# Altium PCB hat.PcbDoc (part 1 of 2)
Units mm, origin at the board's own origin, x right, y up, seen from the top; angles counter-clockwise.
Board outline 64 x 85 mm, 4 copper layers (Top Layer, Ground Plane, Power Plane, Bottom Layer), stack 0.844 mm thick; 120 components, 68 nets, 381 pads, 144 vias.
Unrouted connection lines stored in the file: 19.
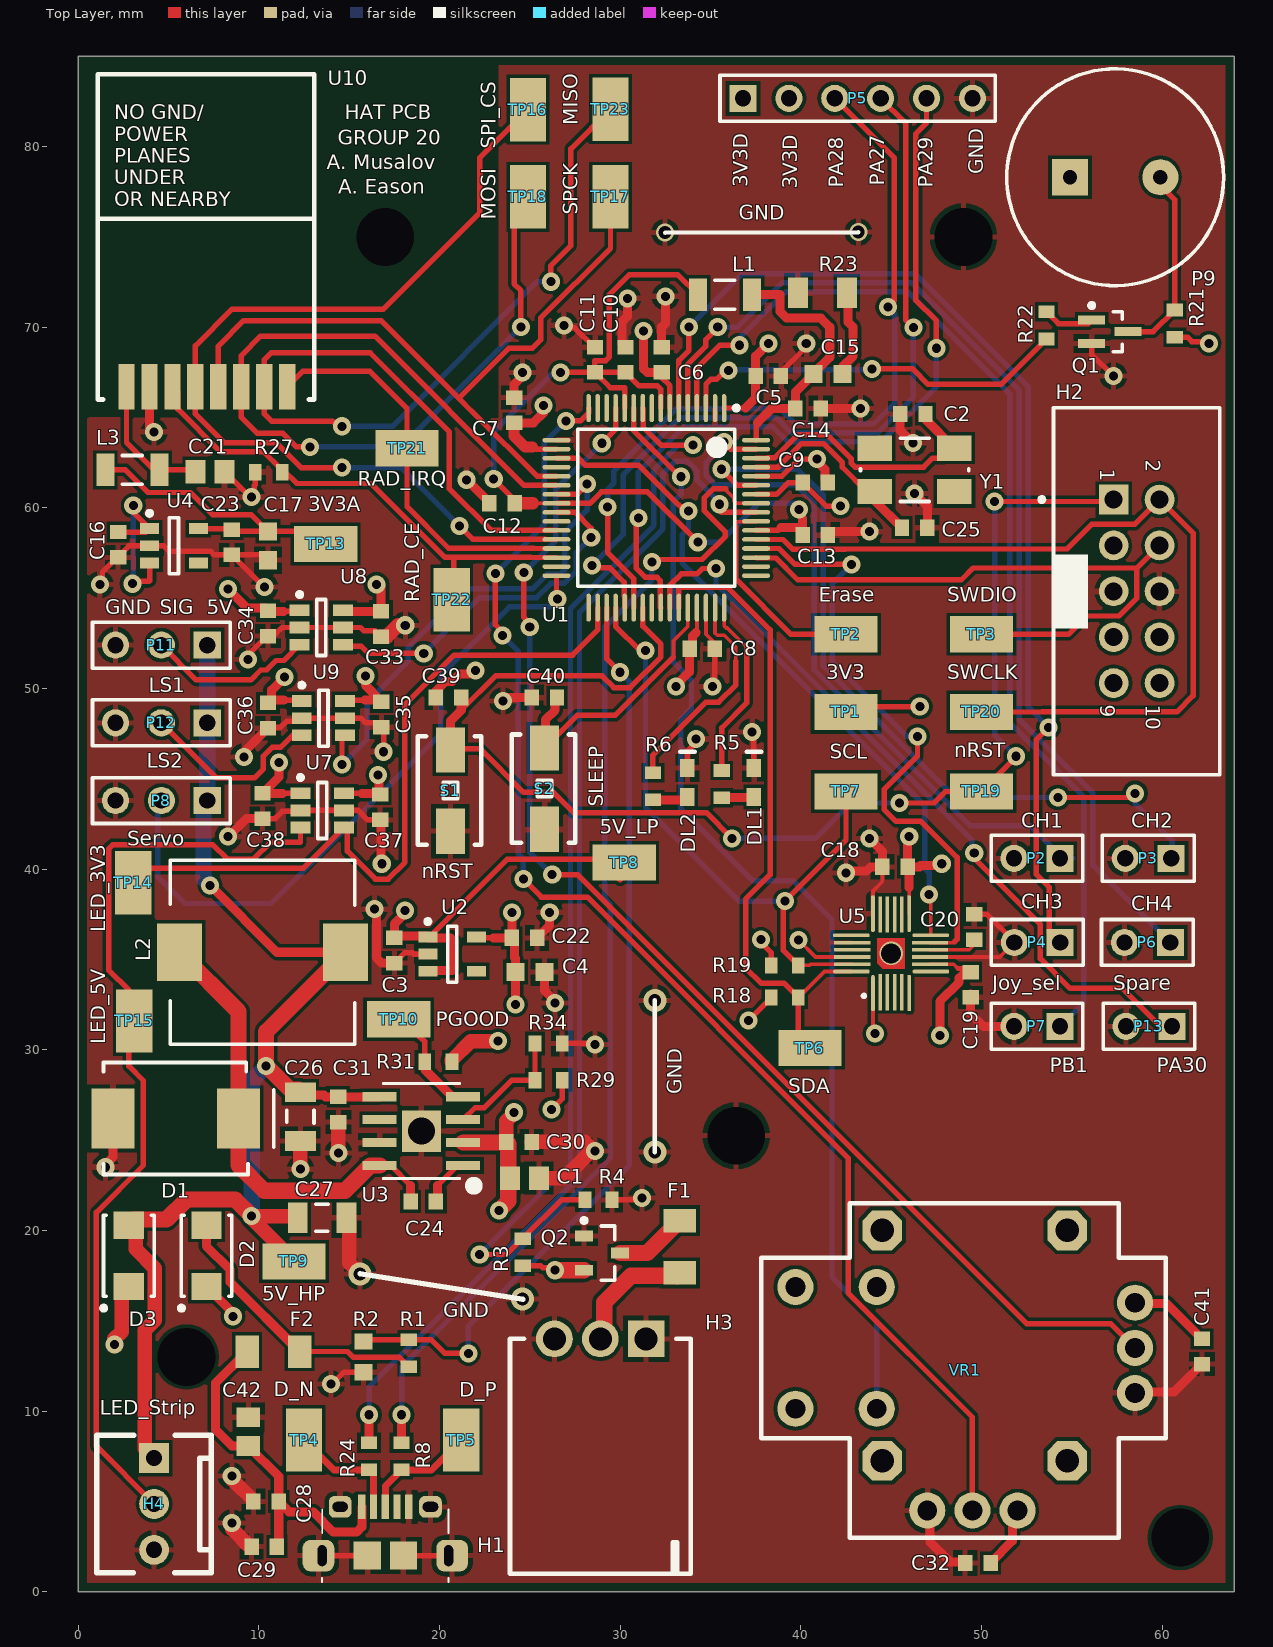
[diagram p0: Top Layer view]
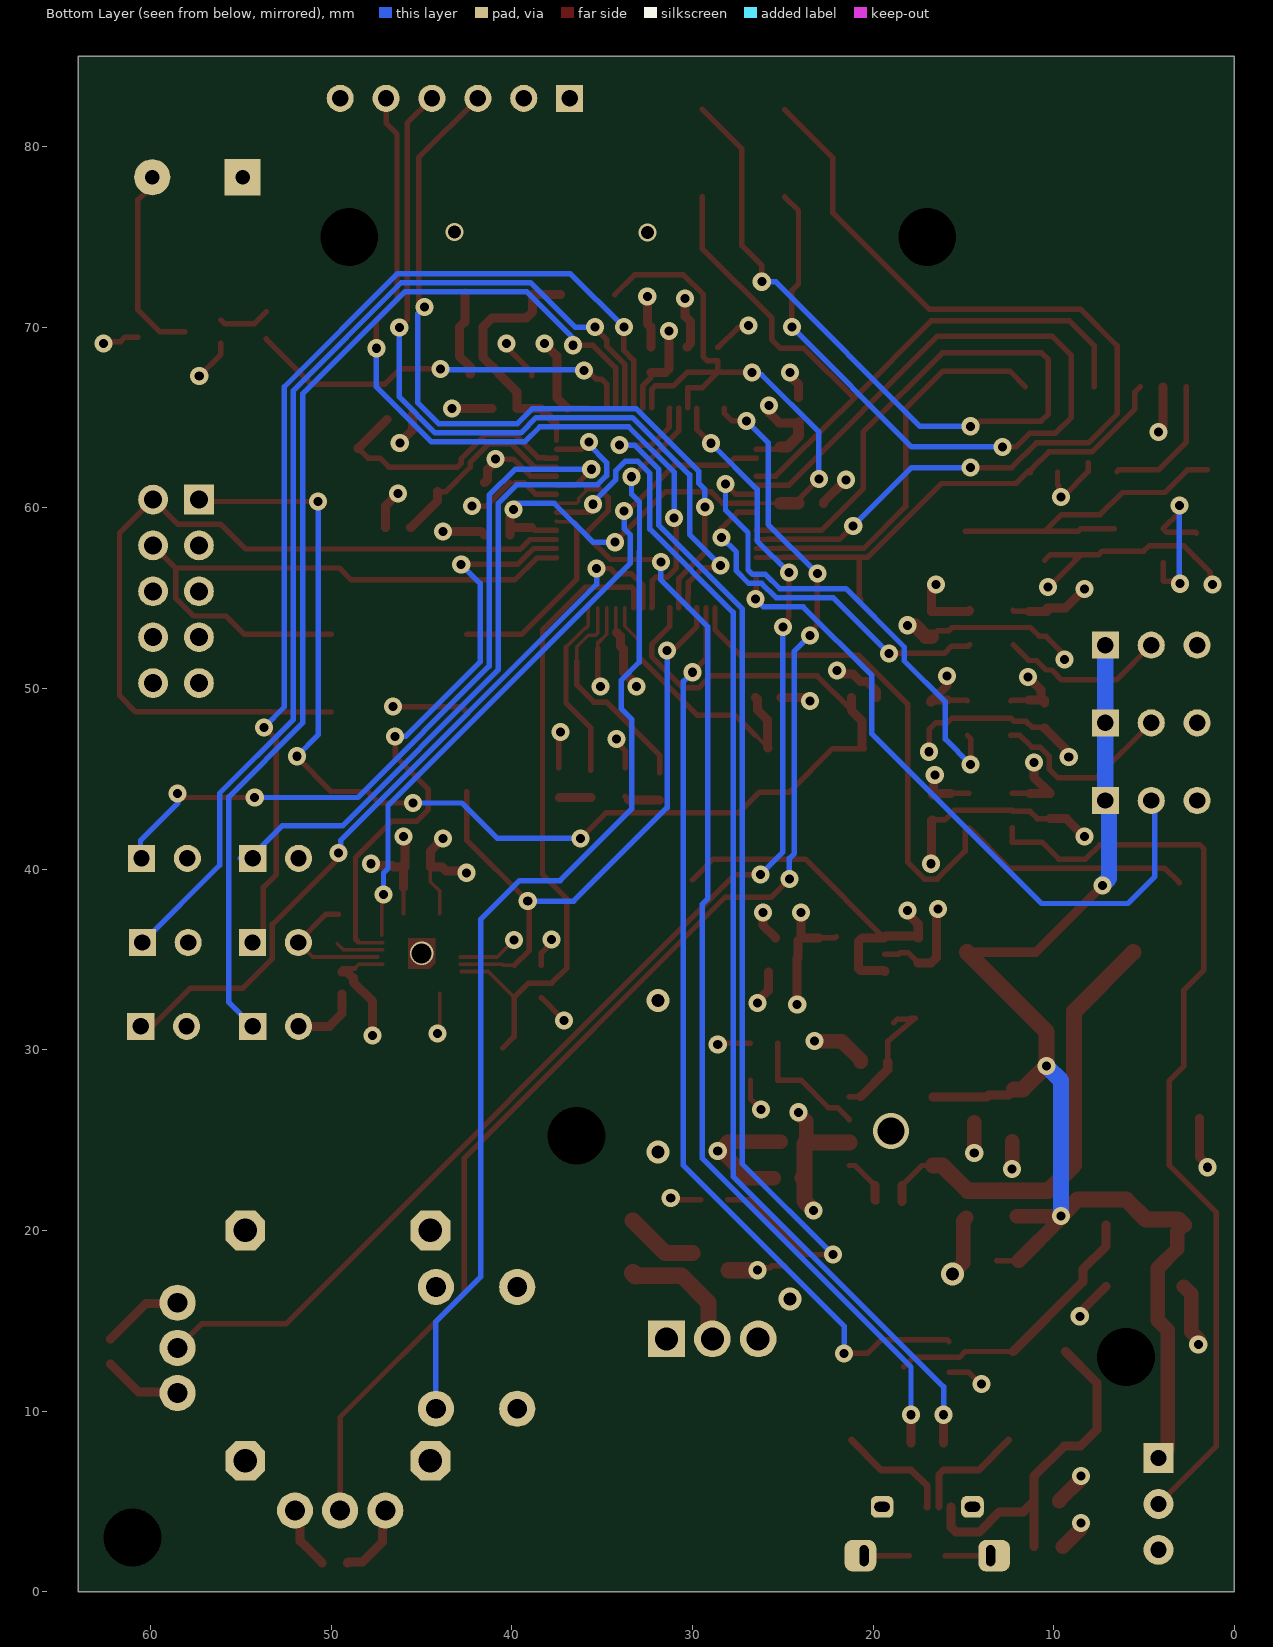
[diagram p1: Bottom Layer view, seen from below]
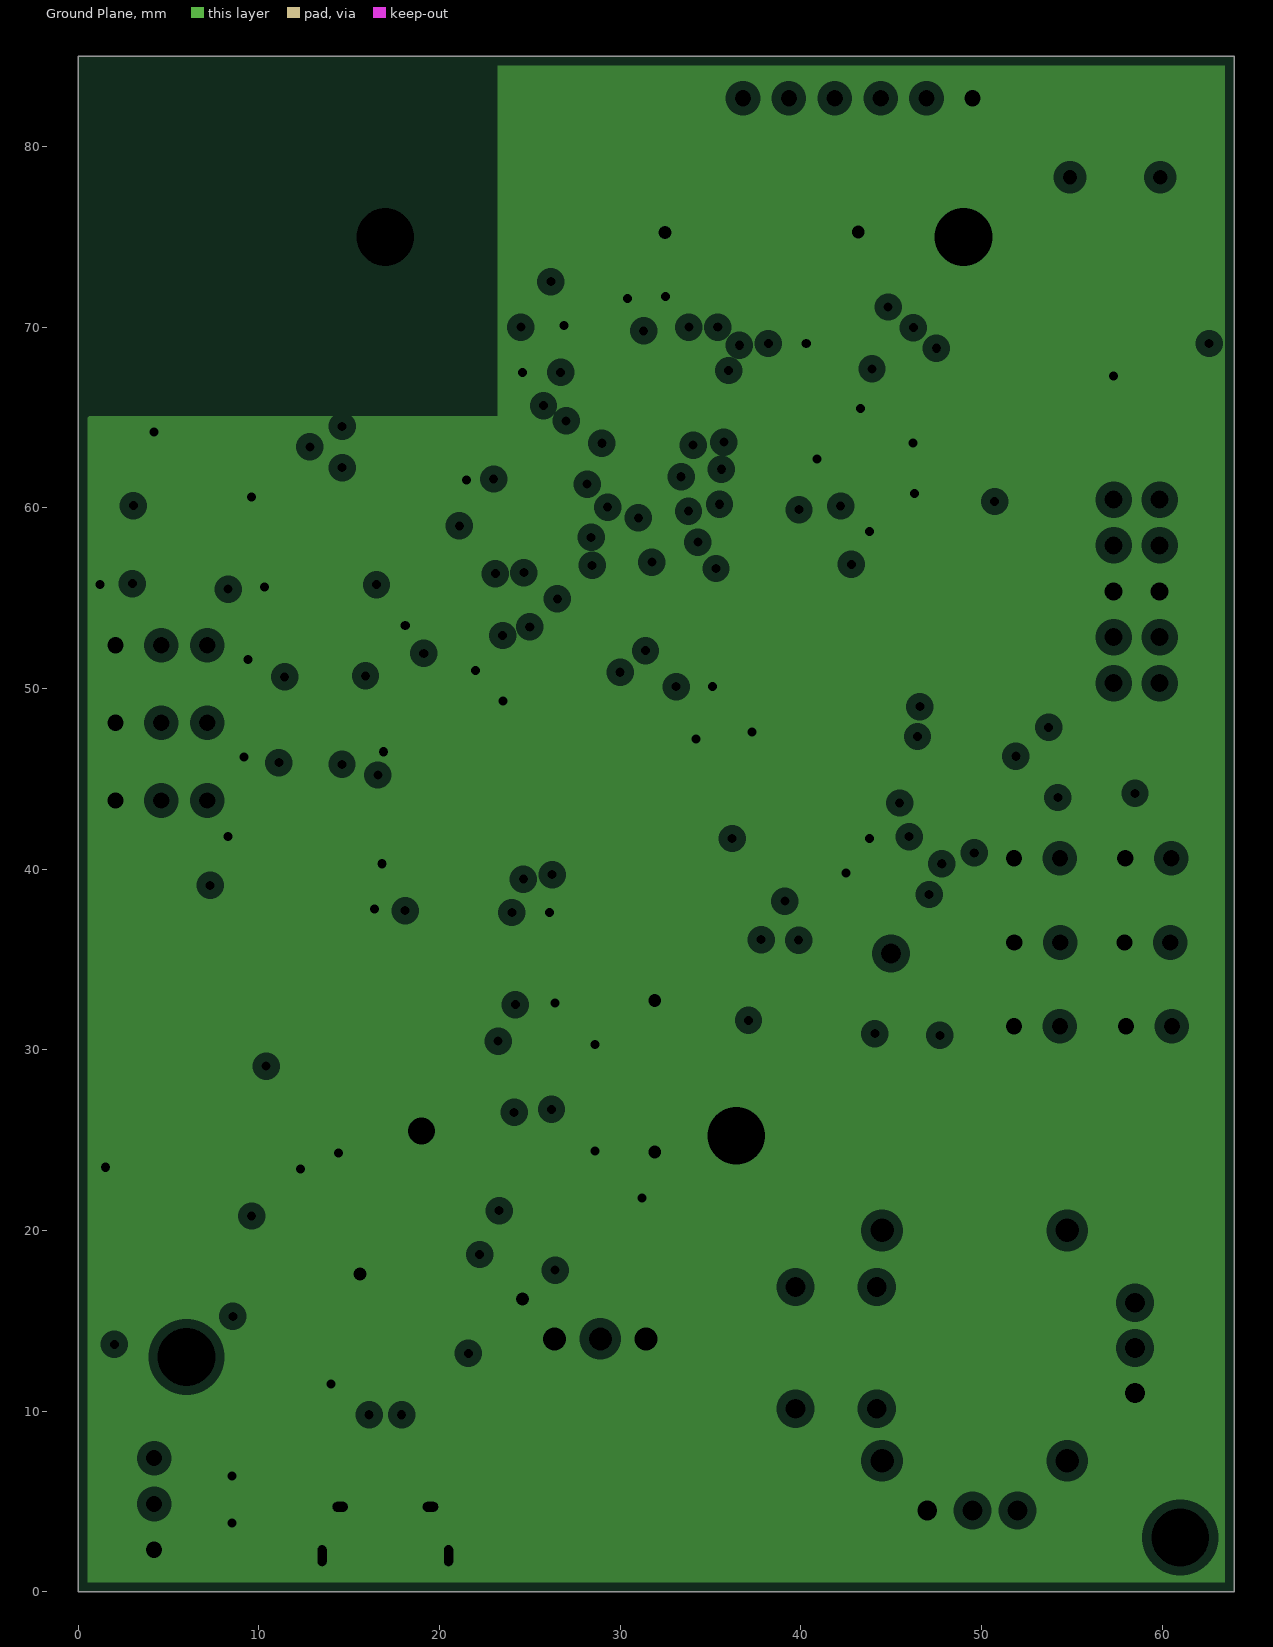
[diagram p2: Ground Plane, clearances drawn from the general rule]
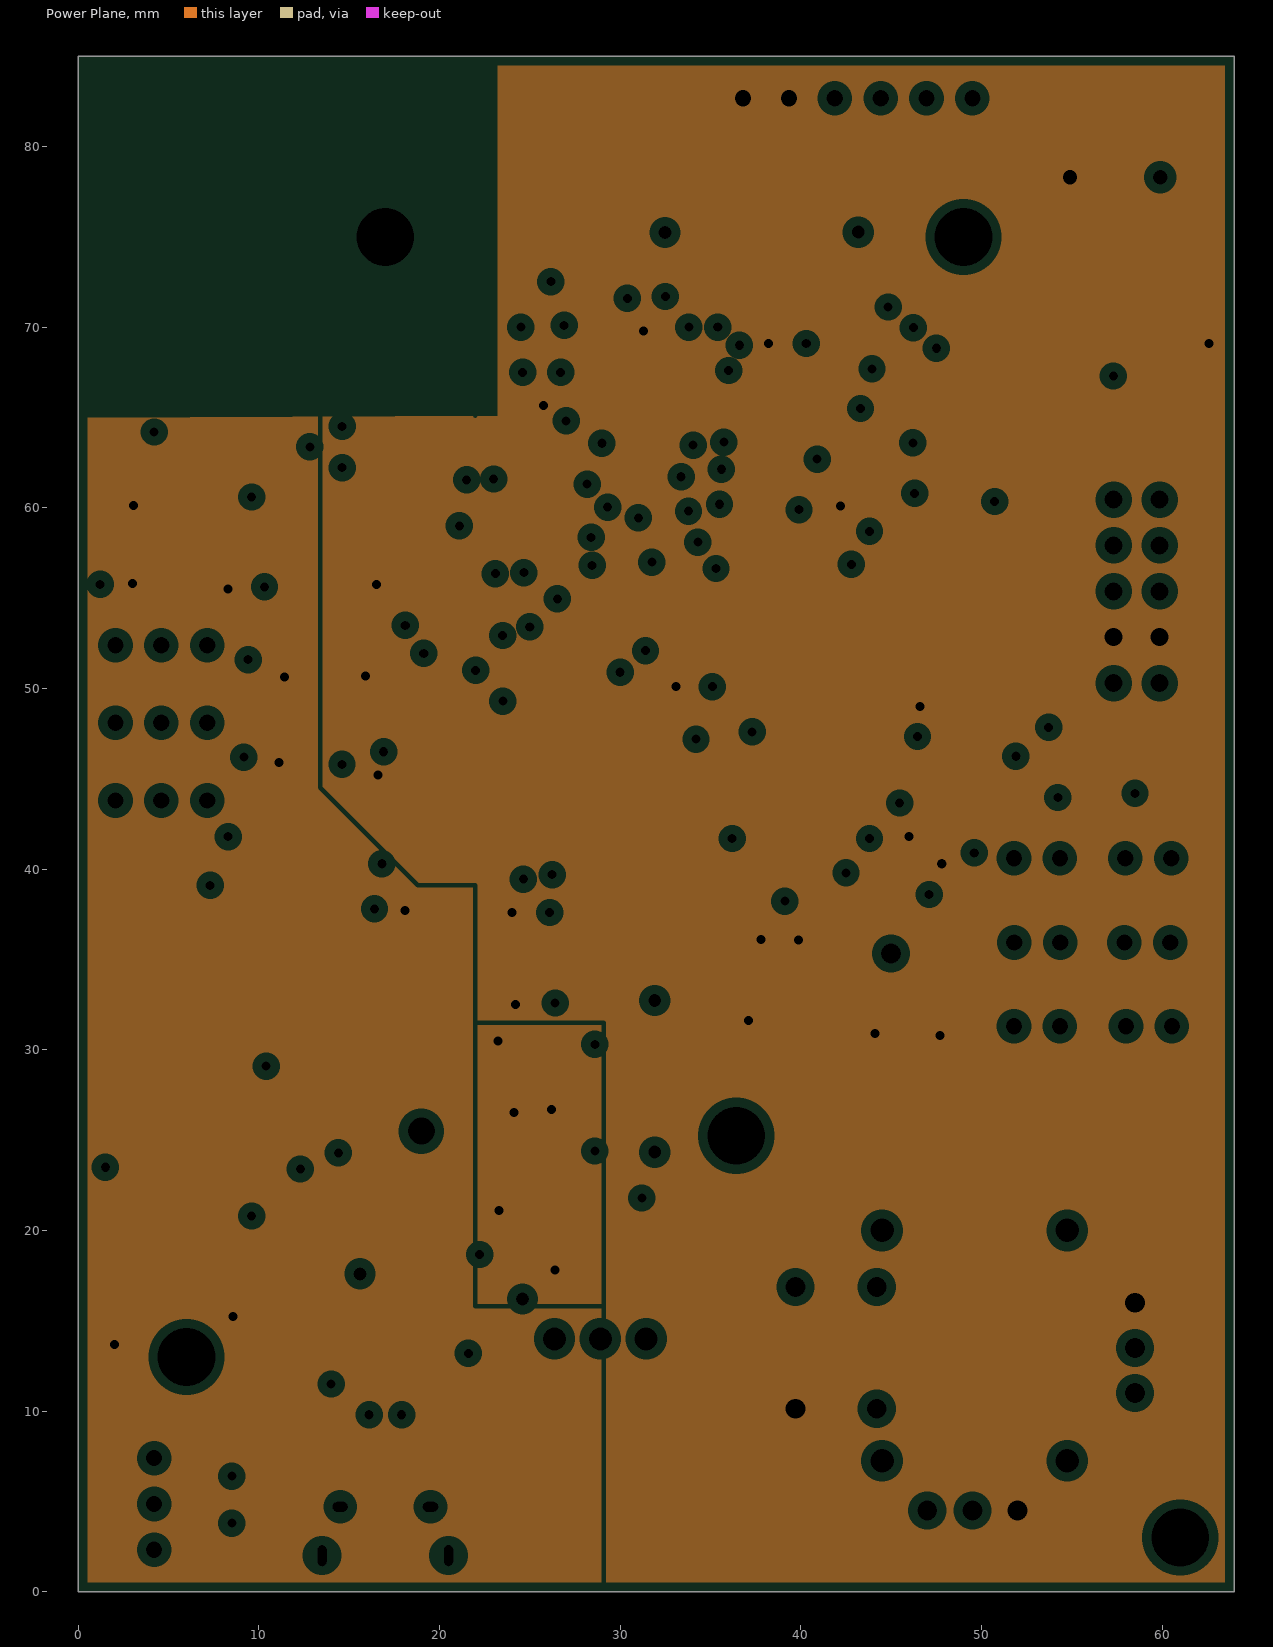
[diagram p3: Power Plane, clearances drawn from the general rule]

## Layer stack, top to bottom
Top Solder: solder mask 0.0102, Solder Resist, Dk 3.5
Top Layer: signal copper 0.0356
Dielectric 1: core 0.32, FR-4, Dk 4.8
Ground Plane: plane copper 0.036, net GND
Dielectric 3: prepreg 0.127, Dk 4.2
Power Plane: plane copper 0.036, net (Multiple Nets)
Dielectric 4: core 0.254, Dk 4.2
Bottom Layer: signal copper 0.0356
Bottom Solder: solder mask 0.0102, Solder Resist, Dk 3.5

## Board outline
0,85 64,85 64,0 0,0 0,85

## Design rules (kind name [scope] priority, off if disabled: settings)
BoardOutlineClearance [All] p1: gap=0.5 ignorepadtopadclearanceinfootprint=FALSE
Clearance GND_POLY [InNamedPolygon('GND')] p1: gap=0.254 ignorepadtopadclearanceinfootprint=FALSE
Clearance Min_Clearance_Circuit_Labs [All] p2: gap=0.2 ignorepadtopadclearanceinfootprint=FALSE
DiffPairsRouting [All] p1: maxlimit=0.254 minlimit=0.254 mostfreqgap=0.254 toplayer_minwidth=0.381 toplayer_maxwidth=0.381 toplayer_prefwidth=0.381 bottomlayer_minwidth=0.381 bottomlayer_maxwidth=0.381 bottomlayer_prefwidth=0.381 maxuncoupledlength=12.7
FanoutControl Fanout_BGA [IsBGA] p1 off: bgadir=Out bgaviamode=Centered fanoutstyle=Auto fanoutdirection=Alternating viagrid=0.025 // Fanout_BGA (Default Rule)
Height [All] p1: minheight=0 maxheight=50.8 prefheight=12.7
HoleSize [All] p1: absolutevalues=TRUE maxlimit=10 minlimit=0.3 maxpercent=80.000 minpercent=20.000
MinimumAnnularRing [All] p1: minimumring=0.1
MinimumSolderMaskSliver [All] p1: minsoldermaskwidth=0.102
NetAntennae [All] p1: netantennaetolerance=1
PlaneClearance [All] p1: clearance=0.508
PlaneConnect [All] p1: planeconnectstyle=Relief reliefexpansion=0.508 reliefentries=4 reliefconductorwidth=0.254 reliefairgap=0.254
PolygonConnect [All] p1: connectstyle=Relief reliefconductorwidth=0.305 reliefentries=4 polygonreliefangle="90 Angle" airgapwidth=0.254
RoutingVias [All] p1: holewidth=0.5 width=1 viastyle="Through Hole" minholewidth=0.3 minwidth=0.8 maxholewidth=1 maxwidth=2
SMDNeckDown [All] p1 off: percent=50.000
SMDToCorner [All] p1: distance=98425
SMDToPlane [All] p1: distance=1968504
SilkToSolderMaskClearance SilkscreenOverComponentPads [IsPad] p1: minsilkscreentomaskgap=0.2 clearancetoexposedcopper=TRUE
SolderMaskExpansion [All] p1: expansion=0.102
ViasUnderSMD [All] p1: allowed=FALSE
Width [All] p1: maxlimit=2 minlimit=0.2 preferedwidth=0.3
21 further rules are at their usual default settings.

## Classes and differential pairs
differential pair D: +D_P -D_N

## Components (designator, comment, footprint, x,y, rotation, side; value= is the part's Value field where it differs from the comment)
C1 "10uF" CAPC2012L 24.7,22.9 r180 top
C2 "27pF" CAPC1608L 46.2,65.2 r0 top
C3 "1uF" CAPC1608L 17.5,35.5 r90 top
C4 "4.7uF" CAPC1608N 25,34.3 r180 top
C5 "100nF" CAPC1608L 38.2,67.3 r180 top
C6 "100nF" CAPC1608L 32.3,68.2 r270 top
C7 "100nF" CAPC1608L 24.13,65.405 r270 top
C8 "100nF" CAPC1608L 34.544,52.197 r180 top
C9 "100nF" CAPC1608L 40.8,61.4 r180 top
C10 "100nF" CAPC1608L 30.3,68.2 r270 top
C11 "100nF" CAPC1608L 28.6,68.2 r270 top
C12 "100nF" CAPC1608L 23.455,60.249 r0 top
C13 "100nF" CAPC1608L 40.8,58.5 r180 top
C14 "100nF" CAPC1608L 40.4,65.5 r180 top
C15 "4.7uF" CAPC1608N 41.5,67.4 r180 top
C16 "1uF" CAPC1608L 2.21,57.963 r90 top
C17 "4.7uF" CAPC1608N 10.5,57.9 r90 top
C18 "100nF" CAPC1608L 45.212,40.132 r180 top
C19 "10nF" CAPC1608L 49.4,33.6 r90 top
C20 "100nF" CAPC1608L 49.6,36.798 r270 top
C21 "10uF" CAPC2012L 7.3,62 r180 top
C22 "100nF" CAPC1608L 24.7,36.2 r180 top
C23 "100nF" CAPC1608L 8.5,58.1 r90 top
C24 "100nF" CAPC1608L 19.1,21.6 r180 top
C25 "27pF" CAPC1608L 46.3,58.9 r180 top
C26 "22uF" CAPC3216L 12.3,26.3 r90 top
C27 "22uF" CAPC3216L 13.5,20.7 r180 top
C28 "100nF" CAPC1608L 10.4,5 r0 top
C29 "1uF" CAPC1608L 10.3,2.5 r0 top
C30 "1uF" CAPC1608L 24.4,24.9 r180 top
C31 "100nF" CAPC1608L 14.4,26.7 r270 top
C32 "100nF" CAPC1608L 49.8,1.6 r0 top
C33 "100nF" CAPC1608L 16.756,53.575 r90 top
C34 "100nF" CAPC1608L 10.503,53.6 r270 top
C35 "100nF" CAPC1608L 16.777,48.558 r90 top
C36 "100nF" CAPC1608L 10.503,48.5 r270 top
C37 "100nF" CAPC1608L 16.713,43.434 r90 top
C38 "100nF" CAPC1608L 10.203,43.5 r270 top
C39 "100nF" CAPC1608L 20.503,49.5 r180 top
C40 "100nF" CAPC1608L 25.803,49.5 r180 top
C41 "100nF" CAPC1608L 62.2,13.3 r90 top
C42 "10uF" CAPC2012L 9.423,8.865 r270 top
D1 "VS-30BQ015-M3/9AT" SMC 5.4,26.2 r0 top
D2 "SS14-E3/5AT" DIOM4227X23N 7.1,18.6 r90 top
D3 "SS14-E3/5AT" DIOM4227X23N 2.8,18.6 r90 top
DL1 "Red" WL-SMCW0603 37.4,45.6 r270 top
DL2 "Green" WL-SMCW0603 33.717,45.6 r270 top
F1 "2A" RESC3216N 33.3,19.1 r90 top
F2 "0.25A" RESC3216N 10.8,13.3 r180 top
H1 "JS_USB_MICRO_B" FCI_USB_10118194-0001LF 17,0.55 r0 top
H2 "Header 5X2 Vert" IDC2.54-V10D 58.586,55.38 r270 top
H3 "Battery_HEADER_3pin" BATT_HEADER_3POS 28.9,14 r180 top
H4 "LED_Strip" MOLEX_KK_3_HDR 4.2,7.4 r270 top value="3 Pin Molex KK Hdr"
L1 "1A max, Idc 0.3R," INDC3216L 35.8,71.8 r180 top
L2 "IND 5.2UH 6A" INDUCTOR5u2 10.2,35.4 r0 top
L3 "1A max, Idc 0.3R," INDC3216L 3,62.1 r180 top
P2 "CH1" HDR1X2 54.34,40.6 r180 top
P3 "CH2" HDR1X2 60.5,40.6 r180 top
P4 "CH3" HDR1X2 54.356,35.941 r180 top
P5 "GPIO_Header" HDR1X6 36.798,82.668 r0 top
P6 "CH4" HDR1X2 60.452,35.941 r180 top
P7 "Joy_sel" HDR1X2 54.34,31.3 r180 top
P8 "Servo" HDR1X3 7.143,43.8 r180 top
P9 "Piezo Buzzer" BUZZER 54.9,78.3 r0 top
P11 "LS1" HDR1X3 7.143,52.4 r180 top
P12 "LS2" HDR1X3 7.143,48.1 r180 top
P13 "Spare" HDR1X2 60.54,31.3 r180 top
Q1 "BC817W" SOT323_M 57.1,69.75 r0 top
Q2 "SSM3J328R,LF" SOT23_L 29,18.75 r0 top
R1 "27K" RESC1608L 18.3,13.2 r270 top
R2 "47K" RESC1608N 15.8,13 r90 top
R3 "150K" RESC1608L 24.6,18.8 r270 top
R4 "100K" RESC1608L 28.8,21.7 r180 top
R5 "3K" RESC1608L 35.622,44.711 r90 top
R6 "2K" RESC1608L 31.812,44.584 r90 top
R8 "27R" RESC1608L 17.9,7.5 r90 top
R18 "2K2" RESC1608L 39.116,32.893 r180 top
R19 "2K2" RESC1608L 39.116,34.671 r180 top
R21 "1K" RESC1608L 60.7,70.2 r270 top
R22 "1K" RESC1608L 53.6,70.1 r270 top
R23 "1R" RESC3216L 41.2,71.9 r0 top
R24 "27R" RESC1608L 16.1,7.5 r90 top
R27 "10K" RESC1608L 10.541,61.976 r0 top
R29 "24K" RESC1608L 26.035,28.321 r0 top
R31 "100K" RESC1608L 19.939,29.337 r0 top
R34 "10K" RESC1608L 26.035,30.353 r180 top
S1 "nRST" EVQPNF05M 20.603,44.35 r90 top
S2 "SLEEP" EVQPNF05M 25.808,44.455 r90 top
TP1 "3V3" TP_1206 42.5,48.7 r180 top value=TP
TP2 "Erase" TP_1206 42.5,53 r180 top value=TP
TP3 "SWDIO" TP_1206 50,53 r0 top value=TP
TP4 "D_N" TP_1206 12.5,8.4 r90 top value=TP
TP5 "D_P" TP_1206 21.2,8.4 r90 top value=TP
TP6 "SDA" TP_1206 40.5,30.1 r0 top value=TP
TP7 "SCL" TP_1206 42.5,44.3 r0 top value=TP
TP8 "5V_LP" TP_1206 30.226,40.361 r0 top value=TP
TP9 "5V_HP" TP_1206 11.938,18.288 r0 top value=TP
TP10 "PGOOD" TP_1206 17.739,31.692 r180 top value=TP
TP13 "3V3A" TP_1206 13.7,58 r180 top value=TP
TP14 "LED_3V3" TP_1206 3.05,39.25 r90 top value=TP
TP15 "LED_5V" TP_1206 3.1,31.6 r90 top value=TP
TP16 "SPI_CS" TP_1206 24.892,82.042 r90 top value=TP
TP17 "SPCK" TP_1206 29.464,77.216 r90 top value=TP
TP18 "MOSI" TP_1206 24.892,77.216 r90 top value=TP
TP19 "nRST" TP_1206 50,44.3 r180 top value=TP
TP20 "SWCLK" TP_1206 50,48.7 r180 top value=TP
TP21 "RAD_IRQ" TP_1206 18.2,63.3 r0 top value=TP
TP22 "RAD_CE" TP_1206 20.676,54.915 r90 top value=TP
TP23 "MISO" TP_1206 29.464,82.067 r90 top value=TP
U1 "ATSAM4S8BA-ANR" LQFP64_L 32,60 r270 top locked
U2 "CAT6219-330TDGT3" SOT95P280X145-5N 20.7,35.3 r0 top
U3 "ADP2302ARDZ-5.0 BUCK" RD_8_1 19,25.5 r180 top locked value=Value
U4 "CAT6219-330TDGT3" SOT95P280X145-5N 5.3,57.9 r0 top
U5 "MPU-9250" QUAD24 43.993,33.985 r90 top locked
U7 "SN74LVC1T45" SOT23-6_N 13.503,43.25 r0 top
U8 "SN74LVC1T45" SOT23-6_N 13.456,53.375 r0 top
U9 "SN74LVC1T45" SOT23-6_N 13.577,48.358 r0 top
U10 "nRF24 SMD" NRF24 1.071,66 r0 top
VR1 "Joystick 10k with Sw" Joystick_Sw 58.5,13.5 r0 top
Y1 "12MHz" 6.0X3.5-4 46.3,62.1 r0 top

## Footprints (in the part's own frame and the unit in brackets; to place one, negate y for a bottom-side part, rotate by r counter-clockwise, add the part's x,y. Pads: shape width x height; smd on the part's side, far side on the other; paste and mask are expansions set on the pad)
6.0X3.5-4 [mm] "4 SMD 6.0X3.5 mm No Lead Crystal"
  rect 1.9x1.4 smd: 1(-2.2,-1.2) 2(2.2,-1.2) 3(2.2,1.2) 4(-2.2,1.2)
  silkscreen extent -3,-1.75 3,1.75, body extent -3,-1.75 3,1.75, height 1.2
BATT_HEADER_3POS [mil]
  rect 80x80 hole 50: 1(-100,0)
  round 80 hole 50: 2(0,0) 3(100,0)
  silkscreen extent -197,0 197,512, body extent -197,-31 200,504, height 294
BUZZER [mm]
  rect 2x2 hole 0.8: 1(0,0)
  round 2 hole 0.8: 2(5,0)
  silkscreen extent -3.5,-6 8.5,6, body extent -3.58,-6.08 8.58,6.08, height 6.5
CAPC1608L [mm] "Chip Capacitor, Body 1.6x0.8mm, IPC High Density"
  rect 0.8x0.9 smd: 1(-0.7,0) 2(0.7,0)
  body extent -0.87,-0.48 0.87,0.48, height 0.85
CAPC1608N [mm] "Chip Capacitor, Body 1.6x0.8mm, IPC Medium Density"
  rect 1x1 smd: 1(-0.8,0) 2(0.8,0)
  body extent -0.87,-0.48 0.87,0.48, height 0.85
CAPC2012L [mm] "Chip Capacitor, Body 2.0x1.3mm, IPC High Density"
  rect 1.1x1.3 smd: 1(-0.8,0) 2(0.8,0)
  body extent -1.1,-0.72 1.1,0.72, height 1.1
CAPC3216L [mm] "Chip Capacitor, Body 3.2x1.6mm, IPC High Density"
  rect 1.1x1.7 smd: 1(-1.35,0) 2(1.35,0)
  silkscreen extent -0.35,-0.75 0.35,0.75, body extent -1.7,-0.9 1.7,0.9, height 1.35
DIOM4227X23N [mm] "Molded Diode, 2-Leads, Body 4.25x2.67mm, IPC Medium Density"
  rect 1.52x1.68 smd: 1(-1.7,0) 2(1.7,0)
  silkscreen extent -3.02,-1.4 2.25,1.51, body extent -2.25,-1.39 2.25,1.4, height 2.29
EVQPNF05M [mm] "Panansonic light touch SMD push button switch"
  rect 2.5x1.6 smd: 1(-2.25,0) 2(2.25,0)
  silkscreen extent -3,-1.7 3,1.8, body extent -3,-1.7 3,1.8, height 5
FCI_USB_10118194-0001LF [mm] "Micro USB B Type Receptacle"
  rect 0.4x1.35 smd mask+0.07: 1(-1.3,4.15) 2(-0.65,4.15) 3(0,4.15) 4(0.65,4.15) 5(1.3,4.15)
  rrect50% 1.75x1.75 hole 0.5 slot 1.15 at 90 deg copper offset -0.2,0 paste+0 mask+0.1: 6(-3.5,1.45)
  rrect50% 1.25x1.2 hole 0.55 slot 0.85 at 0 deg: 6(-2.5,4.15) 6(2.5,4.15)
  rect 1.5x1.55 smd: 6(-1,1.45) 6(1,1.45)
  rrect50% 1.75x1.75 hole 0.5 slot 1.15 at 90 deg copper offset 0.2,0 paste+0 mask+0.1: 6(3.5,1.45)
  silkscreen extent -3.5,0 3.5,4
HDR1X2 [mm] "Connector; Header; 2 Position"
  rect 1.5x1.5 hole 0.9: 1(0,0)
  round 1.5 hole 0.9: 2(2.54,0)
  silkscreen extent -1.27,-1.27 3.81,1.27, body extent -1.25,-1.25 3.79,1.25, height 8.54
HDR1X3 [mm] "Connector; Header; 3 Position"
  rect 1.5x1.5 hole 0.9: 1(0,0)
  round 1.5 hole 0.9: 2(2.54,0) 3(5.08,0)
  silkscreen extent -1.27,-1.27 6.35,1.27, body extent -1.27,-1.27 6.35,1.27, height 8.89
HDR1X6 [mm] "Connector; Header; 6 Position"
  rect 1.5x1.5 hole 0.9: 1(0,0)
  round 1.5 hole 0.9: 2(2.54,0) 3(5.08,0) 4(7.62,0) 5(10.16,0) 6(12.7,0)
  silkscreen extent -1.27,-1.27 13.97,1.27, body extent -1.27,-1.27 13.97,1.27, height 8.89
IDC2.54-V10D [mm] "Connector; IDC, Low Profile Male Header, Thru-Hole; 10 Position; Vertical; Pitch 2.54 mm; Body 20.32 x 9.2 x 9.45 mm (LxWxH)"
  rect 1.65x1.65 hole 1: 1(-5.08,-1.27)
  round 1.65 hole 1: 2(-5.08,1.27) 3(-2.54,-1.27) 4(-2.54,1.27) 5(0,-1.27) 6(0,1.27) 7(2.54,-1.27) 8(2.54,1.27) 9(5.08,-1.27) 10(5.08,1.27)
  silkscreen extent -10.16,-5.37 10.16,4.6, body extent -10.16,-4.6 10.16,4.6, height 9.45
INDC3216L [mm] "Chip Inductor, Body 3.2x1.6mm, IPC High Density"
  rect 1x1.8 smd: 1(-1.5,0) 2(1.5,0)
  silkscreen extent -0.55,-0.8 0.55,0.8, body extent -1.75,-0.95 1.75,0.95, height 1.9
INDUCTOR5u2 [mm]
  rect 2.5x3.2 smd: 1(-4.6,0) 2(4.6,0)
  silkscreen extent -5.1,-5.1 5.1,5.1, body extent -5,-5 5,5, height 3.8
Joystick_Sw [mm]
  round 2 hole 1.1: 1(0,2.5) 2(0,0) 3(0,-2.5) 4(-6.5,-9) 5(-9,-9) 6(-11.5,-9) 7(-14.3,-3.37) 8(-18.8,-3.37) 9(-18.8,3.37) 10(-14.3,3.37)
  oct 2.2x2.2 hole 1.3: 11(-14,-6.25) 12(-3.75,-6.25) 13(-14,6.5) 14(-3.75,6.5)
  silkscreen extent -20.7,-10.5 1.7,8, body extent -22.72,-12.9 4.9,13.77, height 30.23
LQFP64_L [mm] "Thin QFP, 64-Leads, Body 10x10mm, Pitch 0.5mm, IPC High Density"
  oval 1.55x0.25 smd mask+0.07: 1(-5.525,3.75) 2(-5.525,3.25) 3(-5.525,2.75) 4(-5.525,2.25) 5(-5.525,1.75) 6(-5.525,1.25) 7(-5.525,0.75) 8(-5.525,0.25) 9(-5.525,-0.25) 10(-5.525,-0.75) 11(-5.525,-1.25) 12(-5.525,-1.75) 13(-5.525,-2.25) 14(-5.525,-2.75) 15(-5.525,-3.25) 16(-5.525,-3.75) 33(5.525,-3.75) 34(5.525,-3.25) 35(5.525,-2.75) 36(5.525,-2.25) 37(5.525,-1.75) 38(5.525,-1.25) 39(5.525,-0.75) 40(5.525,-0.25) 41(5.525,0.25) 42(5.525,0.75) 43(5.525,1.25) 44(5.525,1.75) 45(5.525,2.25) 46(5.525,2.75) 47(5.525,3.25) 48(5.525,3.75)
  oval 0.25x1.55 smd mask+0.07: 17(-3.75,-5.525) 18(-3.25,-5.525) 19(-2.75,-5.525) 20(-2.25,-5.525) 21(-1.75,-5.525) 22(-1.25,-5.525) 23(-0.75,-5.525) 24(-0.25,-5.525) 25(0.25,-5.525) 26(0.75,-5.525) 27(1.25,-5.525) 28(1.75,-5.525) 29(2.25,-5.525) 30(2.75,-5.525) 31(3.25,-5.525) 32(3.75,-5.525) 49(3.75,5.525) 50(3.25,5.525) 51(2.75,5.525) 52(2.25,5.525) 53(1.75,5.525) 54(1.25,5.525) 55(0.75,5.525) 56(0.25,5.525) 57(-0.25,5.525) 58(-0.75,5.525) 59(-1.25,5.525) 60(-1.75,5.525) 61(-2.25,5.525) 62(-2.75,5.525) 63(-3.25,5.525) 64(-3.75,5.525)
  silkscreen extent -5.65,-4.35 4.35,4.55, body extent -5,-5 5,5, height 1.6
MOLEX_KK_3_HDR [mil] "MOLEX_KK_3_HDR"
  rect 65x65 hole 35.43: 1(0,0)
  round 65 hole 35.43: 2(100,0) 3(200,0)
  silkscreen extent -50,-125 250,125, body extent -50,-114 250,114, height 461
NRF24 [mm]
  rect 0.9x2.5 smd: 1(1.6,0.7) 2(2.871,0.7) 3(4.143,0.7) 4(5.414,0.7) 5(6.686,0.7) 6(7.957,0.7) 7(9.229,0.7) 8(10.5,0.7)
  silkscreen extent 0,0 12,18, body extent 0,0 12,18, height 2.27
QUAD24 [mm]
  oval 2x0.2 smd paste+0.02 mask+0.015: 1(-0.85,0)
  rect 2x0.2 smd paste+0.02 mask+0.015: 2(-0.8,-0.4) 3(-0.8,-0.8) 4(-0.8,-1.2) 5(-0.8,-1.6) 14(3.5,-1.6) 15(3.5,-1.2) 16(3.5,-0.8) 17(3.5,-0.4)
  rrect50% 2x0.2 smd paste+0.02 mask+0.015: 6(-0.85,-2) 13(3.55,-2) 18(3.55,0)
  rrect50% 0.2x2 smd paste+0.02 mask+0.015: 7(0.35,-3.2) 12(2.35,-3.2) 19(2.35,1.2) 24(0.35,1.2)
  rect 0.2x2 smd paste+0.02 mask+0.015: 8(0.75,-3.15) 9(1.15,-3.15) 10(1.55,-3.15) 11(1.95,-3.15) 20(1.95,1.15) 21(1.55,1.15) 22(1.15,1.15) 23(0.75,1.15)
  Top Layer region: 0.5,-1.75 0.5,-0.55 0.8,-0.25 2.2,-0.25 2.2,-1.75
  silkscreen extent -1.05,0.45 -0.95,0.55
RD_8_1 [mil]
  rect 74x20 smd paste+0 mask+0: 1(-91,75) 2(-91,25) 3(-91,-25) 4(-91,-75) 5(91,-75) 6(91,-25) 7(91,25) 8(91,75)
  rect 84.65x90 smd paste-44.5 mask+0: EPAD(0,0)
  silkscreen extent -118,-104 84,123, body extent 0,0 10,10, height 10
RESC1608L [mm] "Chip Resistor, Body 1.6x0.8mm, IPC High Density"
  rect 0.7x0.9 smd: 1(-0.75,0) 2(0.75,0)
  body extent -0.85,-0.48 0.85,0.48, height 0.9
RESC1608N [mm] "Chip Resistor, Body 1.6x0.8mm, IPC Medium Density"
  rect 0.9x1 smd: 1(-0.85,0) 2(0.85,0)
  body extent -0.85,-0.48 0.85,0.48, height 0.6
RESC3216L [mm] "Chip Resistor, Body 3.1x1.6mm, IPC High Density"
  rect 1.1x1.7 smd: 1(-1.35,0) 2(1.35,0)
  body extent -1.68,-0.87 1.68,0.87, height 2.54
RESC3216N [mm] "Chip Resistor, Body 3.2x1.6mm, IPC Medium Density"
  rect 1.3x1.8 smd: 1(-1.45,0) 2(1.45,0)
  body extent -1.68,-0.87 1.68,0.87, height 0.71
SMC [mm] "DO-214-AB/SMC; 2 C-Bend Leads; Body 7.9 x 5.9 mm, inc. leads (LxW)"
  rect 2.4x3.3 smd: 1(-3.475,0) 2(3.475,0)
  silkscreen extent -4,-3.1 5.43,3.1
SOT23-6_N [mm]
  rect 1.1x0.65 smd: 1(-1.2,0.95) 2(-1.2,0) 3(-1.2,-0.95) 4(1.2,-0.95) 5(1.2,0) 6(1.2,0.95)
  silkscreen extent -1.32,-1.55 0.25,1.95, body extent -0.9,-1.55 0.9,1.55, height 1.45
SOT23_L [mm] "SOT23, 3-Leads, Body 2.9x1.3mm, Pitch 0.95mm, Lead Span 2.3mm, IPC High Density"
  rect 1x0.6 smd: 1(-1,0.95) 2(-1,-0.95) 3(1,0)
  silkscreen extent -1.12,-1.5 0.7,1.92, body extent -0.7,-1.5 0.7,1.5, height 1.1
SOT95P280X145-5N [mm] "SOT23, 5-Leads, Body 2.90x2.80mm, Pitch 0.95mm, IPC Medium Density"
  rect 1.05x0.6 smd: 1(-1.35,0.95) 2(-1.35,0) 3(-1.35,-0.95) 4(1.35,-0.95) 5(1.35,0.95)
  silkscreen extent -1.47,-1.55 0.25,1.92, body extent -0.87,-1.52 0.87,1.53, height 1.45
SOT323_M [mm] "SOT323, 3-Leads, Body 2.0x1.3mm, Pitch 0.65mm, Lead Span 2.1mm, IPC Low Density"
  rect 1.5x0.5 smd: 1(-1,0.65) 2(-1,-0.65) 3(1,0)
  silkscreen extent -1.12,-1.1 0.7,1.57, body extent -0.7,-1.1 0.7,1.1, height 1.1
TP_1206 [mm] "Test Point Pad"
  rect 3.5x2 smd: 1(0,0)
  body extent -1.62,-0.85 1.63,0.8, height 2
WL-SMCW0603 [mm] "2.4 x 0.8 x 0.7mm LED"
  rect 1x0.8 smd: 1(0,0) 2(1.6,0)
  silkscreen extent -0.9,-0.4 -0.9,0.4

## Part data
C1 C21 C42: library part CC_10uF_0805_16V, "CAP CER 10uF X5R 16V 0805", Manufacturer="Samsung Electro-Mechanics", Manufacturer Part Number=CL21A106KOQNNWE, Max Voltage=16V, Operating Temperature="-55°C ~ 85°C", Package / Case="0805 (2012 Metric)", Ratings=-, Supplier Part Number 1=1276-2894-1-ND, Temperature Coefficient=X5R, Tolerance=±10%, Applications="General Purpose", Category=Capacitors, Code_IPC=2012[0805], ComponentLink1Description=http://www.samsungsem.com/kr/support/product-search/mlcc/CL21A106KOQNNWE.jsp, ComponentLink1URL=http://www.samsungsem.com/kr/support/product-search/mlcc/CL21A106KOQNNWE.jsp, Features=-, Height - Seated (Max)=-, Lead Spacing=-, Lead Style=-, Mounting Type="Surface Mount, MLCC", Note="Footprint corresponds to dimensions for bulk cassette packaging. This case size has tightened tolerances.", Notification="Current market demand for these product types have resulted in fluctuating and extending lead times. Lead times may differ.", PackageReference=0805, Packaging="Cut Tape (CT)", Part Status=Active, Pricing 1="1=0.35, 10=0.25, 100=0.1178, 500=0.08254, 1000=0.06831 (NZD)", RoHS="RoHS Compliant", Size / Dimension="0.079\" L x 0.049\" W (2.00mm x 1.25mm)", Stock 1=20000, Supplier 1=Digi-Key, Thickness (Max)="0.055\" (1.40mm)", Voltage - Rated=16V
C2 C25: library part CC_27pF_0603, "CAP CER 27pF NPO/COG +-5% 50V 0603", Code_IPC="1608 [0603]", PackageReference=0603, Storage Location="PCB Assembly WS", Supplier="ECE Dept"
C3 C16 C29 C30: library part CC_1uF_0603, "CAP CER 1uF Y5V -20% +80% 16V 0603", Max Voltage=16V, Code_IPC="1608 [0603]", PackageReference=0603, Storage Location="PCB Assembly WS", Supplier="ECE Dept"
C4 C15 C17: library part CC_4.7uF_0603, "CAP CER 4.7uF X5R +-20%  10V 0603", Max Voltage=10V, Code_IPC=2012[0805], Note="Footprint corresponds to dimensions for bulk cassette packaging. This case size has tightened tolerances.", PackageReference=0805, Storage Location="PCB Assembly WS", Supplier="ECE Dept"
C5 C6 C7 C8 C9 C10 C11 C12 C13 C14 C18 C20 C22 C23 C24 C28 C31 C32 C33 C34 C35 C36 C37 C38 C39 C40 C41: library part CC_100nF_0603, "CAP CER 100nF X7R +-10% 50V 0603", Code_IPC="1608 [0603]", PackageReference=0603, Storage Location="PCB Assembly WS", Supplier="ECE Dept"
C19: library part CC_10nF_0603, "CAP CER 10nF X7R +-10% 50V 0603", Code_IPC="1608 [0603]", PackageReference=0603, Storage Location="PCB Assembly WS", Supplier="ECE Dept"
C26 C27: library part CC_22uF_1206, "CAP CER 22uF Y5V -20% +80% 10V 1206", Dielectric=Y5V, Max Voltage=10V, Storage Location="PCB Assembly WS", Supplier="ECE Dept"
D1: library part DS_VS-30BQ015-M3, "DIODE, SCHOTTKY, 3A, 15V, DO-214AB / SMC", Average Rectified Current=3A, Forward Voltage=350mV, Manufacturer="Vishay Semiconductors", Max Forward Surge Current (Ifsm)=650A, Max Reverse Voltage (DC)=15V, Peak Reverse Current=4mA, Supplier Part Number=VS-30BQ015-M3/9AT-ND, Supplier Part Number 1=VS-30BQ015-M3/9ATGIDKR-ND, ComponentLink1Description=https://datasheet.ciiva.com/36181/vs-30bq015-m3-9at-36181258.pdf, ComponentLink1URL=https://datasheet.ciiva.com/36181/vs-30bq015-m3-9at-36181258.pdf, Manufacturer Part Number=VS-30BQ015-M3/9AT, Supplier=Digi-Key, Supplier 1=Digi-Key, Supplier 2=Element14, Supplier Part Number 2=2628288
D2 D3: library part DS_SS14E3, "DIODE, SCHOTTKY, 1A, 40V, DO-214AC", Diode Case Style=DO-214, Forward Current If(AV)=1, Manufacturer="VISHAY GENERAL SEMICONDUCTOR", Package / Case=SMA, Supplier Part Number 1=SS14-E3/5ATGICT-ND, Diode Type=Schottky, Manufacturer Part Number=SS14-E3/5AT, Storage Location="PCB Assembly WS", Supplier="ECE Dept", Supplier 1=Digi-Key, Supplier 2=Farnell, Supplier 3=Mouser, Supplier Part Number 2=9551280, Supplier Part Number 3=625-SS14-E3/11T
DL1: library part DL_150060RS75000, "LED Red 250mcd 0603 SMD", Forward Current If=30, Forward Voltage=2, Manufacturer="WURTH ELEKTRONIK", Manufacturer Part Number=150060RS75000, Supplier Part Number 1=2322071, LED Colour=Red, LED Mounting=SMD, Lens Shape=Rectangular, Luminous Intensity=250, Storage Location="PCB Assembly WS", Supplier="ECE Dept", Supplier 1=Farnell, Viewing Angle=140°, Wavelength Typ=625
DL2: library part DL_150060GS75000, "LED Green 430mcd 0603 SMD", Forward Current If=30, Forward Voltage=3.2, Manufacturer="WURTH ELEKTRONIK", Manufacturer Part Number=150060GS75000, Supplier Part Number 1=2322070, LED Colour=Green, LED Mounting=SMD, Lens Shape=Rectangular, Luminous Intensity=430, Storage Location="PCB Assembly WS", Supplier="ECE Dept", Supplier 1=Farnell, Viewing Angle=140°, Wavelength Typ=520
F1: library part FS_Fuse_2.0A, "Fuse 2.0A Very Fast Acting 1206 SMD", Manufacturer=MULTICOMP, Manufacturer Part Number="MC12CF 002", Supplier Part Number 1=1841029, Manufacturer PN="MC12CF 002", Storage Location="PCB Assembly WS", Supplier="ECE Dept", Supplier 1=Farnell
F2: library part FS_Fuse_0.25A, "Fuse 0.25A Very Fast Acting 1206 SMD", Breaking Capacity="50A @ 32V AC / 63", Fuse Case Style=1206, Fuse Current=250, Manufacturer=MULTICOMP, Manufacturer Part Number=MC12CF.250, Supplier Part Number 1=1841020, Blow Characteristic="Very Fast Acting", Device Marking=D, Fuse Type Blowing Characteristic="Very Fast Acting", Manufacturer PN=MC12CF.250, Storage Location="PCB Assembly WS", Supplier="ECE Dept", Supplier 1=Farnell
H1: library part JS_USB_MICRO_B_SMT, "CONN USB MICRO B RECPT SMT R/A", Manufacturer=FCI, Manufacturer Part Number=10118194-0001LF, Supplier Part Number 1=609-4618-1-ND, Features="Shielded, Solder Retention", Gender=Receptacle, Mounting Type="Surface Mount, Right Angle, Horizontal", Number of Contacts=5, Specifications="USB 2.0", Supplier 1=Digi-Key
H2: library part JA_HDR_IDC_5X2_VERT, "IDC Header, 2,54mm, 10-Pin, Vert", Supplier Part Number 1=1096985, Storage Location="ECE Dept Store", Supplier="ECE Dept", Supplier 1=Farnell
H3: "3Pin Header 2.54mm spacing / Digikey #WM22663-ND", Supplier Part Number 1=WM22663-ND, Supplier 1=Digi-Key
H4: library part LED_Strip_Header, "CONN HEADER 3POS 2.54mm VERT_Thru Hole", Manufacturer=Molex, Manufacturer PN=22-23-2031, Supplier Part Number 1=9731156, Storage Location="ECE Dept Store", Supplier="ECE Dept", Supplier 1=Farnell
L1 L3: library part IN_Ferrite-Bead, "Ferrite Bead, Rdc 0.3R, Z100MHZ 600R, Imax 1A, SMD 1206", DC Current Rating=1, DC Resistance Max=0.08, Ferrite Case Style="1206 ^3216 Metric]", Frequency Range="50MHz to 1", Impedance Tolerance="± 25%", Manufacturer=FAIR-RITE, Manufacturer Part Number=2512066017Y1, Supplier Part Number 1=1612060, Ferrite Mounting=SMD, Impedance=600, Manufacturer PN=2512066017Y1, Storage Location="PCB Assembly WS", Supplier="ECE Dept", Supplier 1=Farnell
L2: library part CDRH104RNP-5R2NC, "FIXED IND 5.2UH 6A 22 MOHM SMD", Current - Saturation=5.6A, DC Resistance (DCR)="22 mOhm Max", Frequency - Self Resonant=-, Manufacturer="Sumida America Components Inc.", Operating Temperature="-40°C ~ 100°C", Package / Case=Nonstandard, Supplier Part Number 1=308-2280-1-ND, Tolerance=±30%, Category="Inductors, Coils, Chokes", ComponentLink1Description=http://products.sumida.com/products/pdf/CDRH104R.pdf, ComponentLink1URL=http://products.sumida.com/products/pdf/CDRH104R.pdf, Height - Seated (Max)="0.157\" (4.00mm)", Manufacturer Part Number=CDRH104RNP-5R2NC, Material - Core=Ferrite, Mounting Type="Surface Mount", Packaging="Cut Tape (CT)", Part Status=Active, Pricing 1="1=2.9, 10=2.678, 100=1.8743, 500=1.5173 (NZD)", Q @ Freq=-, Ratings=-, RoHS="RoHS Compliant", Shielding=Shielded, Size / Dimension="0.402\" L x 0.394\" W (10.20mm x 10.00mm)", Stock 1=3849, Supplier 1=Digi-Key, Supplier Device Package=-, Type=-
P2 P3 P4 P6 P7 P13: library part "JA_PIN_Header 2", "Header, 2-Pin", LatestRevisionDate=17-Jul-2002, LatestRevisionNote="Re-released for DXP Platform.", Publisher="Altium Limited"
P5: library part "JA_PIN_Header 6", "Header, 6-Pin", LatestRevisionDate=17-Jul-2002, LatestRevisionNote="Re-released for DXP Platform.", Publisher="Altium Limited"
P8 P11 P12: library part "JA_PIN_Header 3", "Header, 3-Pin", LatestRevisionDate=17-Jul-2002, LatestRevisionNote="Re-released for DXP Platform.", Publisher="Altium Limited"
P9: "TDK - PS1240P02BT - BUZZER, PIEZO, 70DB, 12.2MM", Frequency=4kHz, Manufacturer 1=TDK, Manufacturer Part Number 1=PS1240P02BT, Max Operating Temperature=70°C, Min Operating Temperature=-10°C, Operating Supply Voltage=3V, Package Quantity=1, Supplier Part Number 1=445-2525-1-ND, ComponentLink1Description=https://datasheet.ciiva.com/0/ef532-ps-112.pdf?src-supplier=Digi-Key, ComponentLink1URL=https://datasheet.ciiva.com/0/ef532-ps-112.pdf?src-supplier=Digi-Key, ComponentLink2Description=https://datasheet.ciiva.com/0/ef532-ps-111.pdf?src-supplier=Digi-Key, ComponentLink2URL=https://datasheet.ciiva.com/0/ef532-ps-111.pdf?src-supplier=Digi-Key, ComponentLink3Description=https://datasheet.ciiva.com/3306/ef532-ps-3306958.pdf?src-supplier=Avnet, ComponentLink3URL=https://datasheet.ciiva.com/3306/ef532-ps-3306958.pdf?src-supplier=Avnet, ComponentLink4Description=https://datasheet.ciiva.com/16225/ef532-ps-16225062.pdf?src-supplier=Onlinecomponents.com, ComponentLink4URL=https://datasheet.ciiva.com/16225/ef532-ps-16225062.pdf?src-supplier=Onlinecomponents.com, Diameter=12.2mm, Height=6.5mm, Lead Free="Lead Free", Mount="Through Hole", Number of Pins=2, Number of Terminals/Pins=2, Packaging="Tape and Reel", Pricing 1="1=0.61000, 10=0.52500, 25=0.49120, 50=0.46580, 100=0.44110 (USD)", RoHS=Yes, RoHS Compliant=Yes, Series=PS, Stock 1=24025, Supplier 1=Digi-Key, Termination="PC Pins", Voltage Rating (DC)=3V, Washable=No
Q1: library part TB_BC817W, "NPN GP Bipolar Transistor 45V 500mA SOT323", Manufacturer=NXP, Supplier Part Number 1=2114873, Manufacturer PN=BC817W, Storage Location="PCB Assembly WS", Supplier="ECE Dept", Supplier 1=Farnell, Supplier 2=Digi-Key, Supplier Part Number 2=1727-4843-1-ND
Q2: library part TM_SSM3J328R, "MOSFET P-CH 20V 6A SOT23-3", Case/Package=SOT-23-3, Continuous Drain Current (ID)=6A, Drain to Source Breakdown Voltage=-20V, Drain to Source Resistance=47.4mR, Drain to Source Voltage (Vdss)=20V, Gate to Source Voltage (Vgs)=8V, Input Capacitance=840pF, Input Capacitance (Ciss) @ Vds="840pF @ 10V", Manufacturer=Toshiba, Max Operating Temperature=150°C, Max Power Dissipation=1W, Min Operating Temperature=-55°C, Package / Case="SOT-23-3 Flat Leads", Package Quantity=3000, Power Dissipation=2W, Supplier Device Package=SOT-23F, Supplier Part Number=SSM3J328RLFDKR-ND, ComponentLink1Description=https://datasheet.ciiva.com/11158/ssm3j328r-datasheet-en-20140301-11158652.pdf, ComponentLink1URL=https://datasheet.ciiva.com/11158/ssm3j328r-datasheet-en-20140301-11158652.pdf, Current - Continuous Drain (Id) @ 25° C=6A, Element Configuration=Single, FET Feature="Logic Level Gate, 1.5V Drive", FET Type="MOSFET P-Channel, Metal Oxide", Gate Charge (Qg) @ Vgs="12.8nC @ 4.5V", Manufacturer Part Number=SSM3J328R,LF, Mount="Surface Mount", Number of Channels=1, Number of Elements=1, Number of Pins=3, Packaging="Tape and Reel", Power - Max=1W, Pricing="1=0.79, 10=0.658, 25=0.5772, 100=0.4939, 250=0.42836, 500=0.36284, 1000=0.27972 (NZD)", Radiation Hardening=No, Rds On Max=29.8mR, Storage Location="PCB Assembly WS", Supplier=Digi-Key, Supplier 1=Digi-Key, Supplier Part Number 1=SSM3J328RLFDKR-ND, Turn-Off Delay Time=107ns, Turn-On Delay Time=32ns, Vgs(th) (Max) @ Id="1V @ 1mA"
R1: library part RS_27K, "RES 27K OHM 1/10W 5% 0603 SMD", Storage Location="PCB Assembly WS", Supplier="ECE Dept"
R2: library part RS_47K, "RES 47.0K OHM 1/10W 5% 0603 SMD", Storage Location="PCB Assembly WS", Supplier="ECE Dept"
R3: library part RS_150K, "RES 150K OHM 1/10W 5% 0603 SMD", Storage Location="PCB Assembly WS", Supplier="ECE Dept"
R4 R31: library part RS_100K, "RES 100K OHM 1/10W 5% 0603 SMD", Storage Location="PCB Assembly WS", Supplier="ECE Dept"
R5: library part RS_3K, "RES 3K OHM 1/10W 5% 0603 SMD", Storage Location="PCB Assembly WS", Supplier="ECE Dept"
R6: library part RS_2K, "RES 2K OHM 1/10W 5% 0603 SMD", Storage Location="PCB Assembly WS", Supplier="ECE Dept"
R8 R24: library part RS_27R, "RES 27 OHM 1/10W 5% 0603 SMD", Storage Location="PCB Assembly WS", Supplier="ECE Dept"
R18 R19: library part RS_2K2, "RES 2.2K OHM 1/10W 5% 0603 SMD", Storage Location="PCB Assembly WS", Supplier="ECE Dept"
R21 R22: library part RS_1K, "RES 1.0K OHM 1/10W 5% 0603 SMD", Storage Location="PCB Assembly WS", Supplier="ECE Dept"
R23: library part RT_1R, "RES 1R OHM 1/4W 5% 1206 SMD", Storage Location="PCB Assembly WS", Supplier="ECE Dept"
R27 R34: library part RS_10K, "RES 10.0K OHM 1/10W 5% 0603 SMD", Storage Location="PCB Assembly WS", Supplier="ECE Dept"
R29: library part RS_24K, "RES 24K OHM 1/10W 5% 0603 SMD", Storage Location="PCB Assembly WS", Supplier="ECE Dept"
S1 S2: library part WS_EVQPNF05M, "Panasonic 6 x 3.5mm SMD Light Touch Switch Type SMD", Manufacturer=Panasonic, Manufacturer PN=EVQPNF05M, Supplier Part Number 1=2079481, PackageDescription="6.0 x 3.5 mm", Storage Location="PCB Assembly WS", Supplier="ECE Dept", Supplier 1=Farnell, Supplier 2=Digi-Key, Supplier Part Number 2=P13598SCT-ND
TP1 TP2 TP3 TP4 TP5 TP6 TP7 TP8 TP9 TP10 TP13 TP14 TP15 TP16 TP17 TP18 TP19 TP20 TP21 TP22 TP23: library part TP_1206, "Test-Point 3.3x1.6x2.1mm SMD", Manufacturer="Harwin Inc", Manufacturer Part Number=S1751-46R, Supplier Part Number 1=952-1478-2-ND, Mounting Type="Surface Mount", Storage Location=ProtoPlace, Supplier="ECE Dept", Supplier 1=Digi-Key, Supplier 2=Farnell, Supplier Part Number 2=1826282, Type="PC Test Point"
U1: library part SE_ATSAM4S16BA-MU, "IC MCU 32BIT 512KB FLASH 64LQFP", Manufacturer=Atmel, Package / Case=64-LQFP, Supplier Part Number 1=ATSAM4S8BA-ANRCT-ND, Voltage - Supply (Vcc/Vdd)="1.62 V ~ 3.6 V", Code_JEDEC=MO-220VMMD-3, ComponentLink1Description="Manufacturer URL", ComponentLink1URL=http://www.atmel.com/, ComponentLink2Description="SAM4S Series Datasheet", ComponentLink2URL=http://www.atmel.com/dyn/resources/prod_documents/11100.pdf, ComponentLink3Description="SAM4S Series Summary", ComponentLink3URL=http://www.atmel.com/dyn/resources/prod_documents/11100S.pdf, Connectivity="I²C, IrDA, Memory Card, SPI, SSC, UART/USART, USB", Core Processor="ARM® Cortex®-M4", Core Size=32-Bit, Data Converters="A/D 11x12b, D/A 2x12b", Manufacturer Part Number=ATSAM4S8BA-ANR, Number of I/O=47, PackageDescription="64-Pin Quad Flat No-Lead (QFN) Sawn, 9 x 9 x 1.0 mm Body, 0.5 mm Pitch, Exposed Pad", PackageReference=64PS, PackageVersion="revJ, Jul-2007", Packaging="Cut Tape (CT)", Peripherals="Brown-out Detect/Reset, DMA, POR, PWM, WDT", Program Memory Size="512KB (512K x 8)", Program Memory Type=FLASH, RAM Size="128K x 8", Speed=120MHz, Supplier 1=Digi-Key
U2 U4: library part SV_CAT6219-330TDGT3, "IC REG LIN 3.3V 500MA TSOT23-5", Base Part Number=CAT6219, Current - Output=500mA, Package / Case="SOT-23-5 Thin, TSOT-23-5", Supplier Device Package=TSOT-23-5, Supplier Part Number=CAT6219-330TDGT3CT-ND, Voltage - Input (Max)=5.5V, Voltage - Output (Min/Fixed)=3.3V, Voltage Dropout (Max)="0.5V @ 500mA", ComponentLink1Description=http://www.onsemi.com/pub/Collateral/CAT6219-D.PDF, ComponentLink1URL=http://www.onsemi.com/pub/Collateral/CAT6219-D.PDF, Manufacturer Part Number=CAT6219-330TDGT3, Supplier=Digi-Key, Supplier 1=Digi-Key
U3: library part ADP2302ARDZ-5.0-R7, "IC REG BUCK 5V 2A 8SOIC", Current - Output=2A, Frequency - Switching=700kHz, Supplier Part Number 1=ADP2302ARDZ-5.0-R7CT-ND, Voltage - Input (Max)=20V, Voltage - Output (Min/Fixed)=5V, Manufacturer_Part_Number=ADP2302ARDZ-5.0-R7, Output Type=Fixed, Supplier 1=Digi-Key, Type=DEV, Vendor="Analog Devices Inc"
U5: "9 axis IMU"
U7 U8 U9: "1.8V - 5V level converter"
U10: library part NRF24, "nRF24 SMD Module", Warning="No power planes near or under device"
VR1: "JOYSTICK 10K OHM 2 AXIS TH", Manufacturer 1=SparkFun, Manufacturer Part Number 1=COM-09032, Supplier Part Number 1=1568-1526-ND, ComponentLink1Description=https://media.digikey.com/pdf/Data%20Sheets/Sparkfun%20PDFs/COM-09032_Web.pdf?src-supplier=Digi-Key, ComponentLink1URL=https://media.digikey.com/pdf/Data%20Sheets/Sparkfun%20PDFs/COM-09032_Web.pdf?src-supplier=Digi-Key, Pricing 1="1=3.95000 (USD)", RoHS=No, Stock 1=563, Supplier 1=Digi-Key
Y1: library part XT_CRYSTAL_12MHz_18pF, "CRYSTAL 12MHZ 18PF 6X3.5mm SMD", ESR (Equivalent Series Resistance)="60 Ohm", Frequency Stability=±50ppm, Frequency Tolerance=±30ppm, Load Capacitance=18pF, Manufacturer="CTS-Frequency Controls", Manufacturer Part Number=406C35D12M00000, Operating Mode=Fundamental, Operating Temperature="-20°C ~ 70°C", Package / Case="4-SMD, No Lead (DFN, LCC)", Supplier Part Number 1=CTX855CT-ND, Frequency=12MHz, Height="0.047\" (1.20mm)", Mounting Type="Surface Mount", Size / Dimension="0.236\" L x 0.138\" W (6.00mm x 3.50mm)", Supplier 1=Digi-Key

## Free pads (board coordinates)
  round 1.524 hole 3.2: 2(6,13) 2(17,75) 2(36.424,25.248) 2(49,75) 2(61,3)

## Via types
v1: diameter 1, hole 0.5, Top Layer to Bottom Layer, 136 vias
v2: diameter 1.27, hole 0.711, Top Layer to Bottom Layer, 4 vias
v3: diameter 1, hole 0.711, Top Layer to Bottom Layer, 2 vias
v4: diameter 1.3, hole 1.1, Top Layer to Bottom Layer, 1 vias
v5: diameter 2, hole 1.5, Top Layer to Bottom Layer, 1 vias

## Nets (pads, with @x,y where several pads share a name; then routed paths per layer and width w, separated by ;. In a path a pad name is that pad's centre, name@x,y a point inside that pad or via, vN(x,y) a via of type N, cw(c..) or ccw(c..) an arc to the next point about the centre after c; other vN are vias at no path point)
3V3A: C17.2 C23.2 L3.2 TP13.1 U4.5 | length 18.7
  Top Layer w0.3: L3.2@1.5,62.1 2.605,62.1 3.855,60.85 6.206,60.85 7.432,59.624 9.576,59.624 C17.2@10.45,58.75 ; U4.5@6.65,58.85 8.5,58.85 8.65,58.7 10.4,58.7 C17.2@10.45,58.75 ; TP13.1@14.9,58.7 C17.2@10.5,58.7 C17.2@10.45,58.75
3V3D: C4.2 C5.2 C6.2 C7.2 C8.2 C9.2 C18.1 C19.2 C22.2 C32.2 C33.2 C35.2 C37.2 C41.2 H2.7 H2.8 P5.1 P5.2 P9.1 R18.2 R19.2 R21.2 TP1.1 U1.1 U1.7 U1.18 U1.45 U1.58 U2.5 U5.1 U5.8 U5.13 U5.22 U7.6 U8.6 U9.6 VR1.1 VR1.4 VR1.8 | length 80.4
  Top Layer w0.2: 34.2,53.1 34.25,53.15 U1.45@34.25,54.475 ; v1(39.878,36.068) 40.811,35.135 U5.22@42.843,35.135 ; U5.1@43.993,33.135 43.993,31.007 v1(44.1,30.9) ; U5.13@45.993,37.535 45.993,38.993 ; U5.8@47.143,34.735 48.465,34.735 48.7,34.5 ; C19.2@49.2,34.5 C19.2@49.4,34.3
  Top Layer w0.3: U7.6@14.703,44.2 15.703,44.2 ; U9.6@14.777,49.308 14.827,49.358 15.877,49.358 ; U2.5@22.05,36.25 22.1,36.2 23,36.2 ; 25.146,63.373 25.269,63.25 U1.18@26.475,63.25 ; C6.2@32.3,67.217 32.75,66.767 U1.7@32.75,65.525 ; U1.1@35.75,65.525 36.925,65.525 ; v1(37.1,31.627) R18.2@38.366,32.893 ; U1.58@37.525,60.75 38.648,60.75 39.148,61.25 39.162,61.25 39.312,61.4 C9.2@39.8,61.4 ; v1(37.8,36.1) 37.8,35.937 38.366,35.371 R19.2@38.366,34.671 ; C9.2@40.1,61.4 41.4,60.1 v1(42.2,60.1) ; TP1.1@42.5,48.7 42.797,48.997 v1(46.584,48.997) ; 48.7,34.5 49.2,34.5 C19.2@49.35,34.5 ; R21.2@60.7,69.45 61.4,69.45 61.65,69.2 62.5,69.2 v1(62.6,69.1)
  Top Layer w0.5: U8.6@14.656,54.325 14.706,54.275 C33.2@16.756,54.275 v1@16.756,55.71 ; 15.703,44.2 16.603,44.2 C37.2@16.65,44.153 ; 15.877,49.358 C35.2@16.727,49.358 ; v1(15.903,50.7) 15.903,50.182 C35.2@16.727,49.358 ; v1(16.51,55.753) v1@16.553,55.71 ; v1(16.586,45.212) 16.65,45.148 C37.2@16.65,44.153 ; C37.2@16.703,44.1 C37.2@16.65,44.153 ; C35.2@16.777,49.258 16.827,49.258 C35.2@16.727,49.358 ; C35.2@16.777,49.358 C35.2@16.727,49.358 ; 23,36.2 C22.2@24,36.2 ; v1(24,37.6) C22.2@24,36.2 ; C7.2@24.13,64.705 24.135,64.7 25.2,64.7 25.756,65.256 v1(25.756,65.659) ; v1(24.2,32.5) C4.2@24.2,34.3 24.2,35.05 24.15,35.1 24.15,36.05 C22.2@24,36.2 ; v1(31.3,69.8) 31.3,67.7 31.5,67.5 C6.2@32.3,67.5 ; v1(33.1,50.1) 33.1,50.194 33.826,50.92 33.826,52.179 C8.2@33.844,52.197 33.994,52.347 33.994,52.894 34.2,53.1 ; 36.925,65.525 37.5,66.1 C5.2@37.5,67.3 37.5,68.4 v1(38.2,69.1) ; 45.993,38.993 45.993,40.051 C18.1@45.912,40.132 ; v1(46,41.8) 45.912,41.712 C18.1@45.912,40.132 ; v1(47.7,30.8) 47.7,32.686 48.764,33.75 48.764,33.964 49.1,34.3 C19.2@49.4,34.3 ; v1(47.8,40.3) 47.704,40.204 46.634,40.204 46.562,40.132 C18.1@45.912,40.132 ; C32.2@50.5,1.6 51.713,2.813 51.713,4.213 VR1.4@52,4.5 ; VR1.1@58.5,16 58.55,15.95 60.25,15.95 C41.2@62.2,14
  Top Layer w0.6: C7.2@24.13,64.705 24.13,63.978 24.735,63.373 25.146,63.373
5V_HP: C26.2 C27.2 C31.1 D3.2 H4.1 L2.2 P8.1 P11.1 P12.1 TP9.1 U3.5 | length 75.6
  Top Layer w0.3: v1@9.6,20.665 v1(9.6,20.8) ; TP9.1@11.938,18.327 TP9.1@13.162,18.327 ; C27.2@12.05,20.8 C27.2@12.15,20.7 ; U3.5@16.684,27.4 U3.5@16.689,27.405
  Top Layer w0.5: v1(7.3,39.1) 11,35.4 L2.2@14.8,35.4 ; C26.2@12.2,27.8 12.5,27.5 13.6,27.5 13.7,27.4 C31.1@14.4,27.4 U3.5@16.684,27.4
  Top Layer w0.8: D3.2@2.8,20.3 3.175,19.925 3.175,18.974 4.24,17.909 4.24,15.038 3.683,14.481 3.683,7.917 H4.1@4.2,7.4 ; v1@9.6,20.665 TP9.1@11.938,18.327 ; v1(9.6,20.8) C27.2@12.05,20.8
  Top Layer w0.9: D3.2@2.8,20.3 3.11,20.61 4.891,20.61 5.991,21.71 8.69,21.71 v1(9.6,20.8) ; C26.2@12.2,27.8 12.192,27.808 11.719,27.808 10.427,29.1 v1(10.4,29.1) 10.4,31 L2.2@14.8,35.4
  Bottom Layer w0.5: v1@7.15,39.25 v1(7.3,39.1) ; P8.1@7.443,43.8 P8.1@7.503,43.74
  Bottom Layer w0.9: P11.1@7.143,52.4 P12.1@7.143,48.1 P8.1@7.143,43.8 6.94,43.597 6.94,39.487 7.3,39.127 v1(7.3,39.1) ; v1(9.6,20.8) 9.6,28.3 v1(10.4,29.1)
5V_LP: C3.2 C16.2 C34.1 C36.1 C38.1 D2.1 D3.1 TP8.1 U2.1 U2.3 U4.1 U4.3 U7.1 U8.1 U9.1 | length 49.3
  Top Layer w0.3: C16.2@2.1,58.6 2.15,58.65 3.75,58.65 U4.1@3.95,58.85 3.048,59.752 v1(3.048,60.122) ; v1(3,55.8) 3.134,55.934 3.908,55.934 3.95,55.976 U4.3@3.95,56.95 ; 11.303,44.2 U7.1@12.303,44.2 ; 11.356,54.275 12.206,54.275 U8.1@12.256,54.325 ; 11.377,49.358 12.327,49.358 U9.1@12.377,49.308 ; U2.1@19.4,36.2 23.75,40.55 28.85,40.55 29.633,39.767 TP8.1@30,39.4
  Top Layer w0.5: D2.1@7.1,16.9 8.56,15.44 v1(8.56,15.251) ; v1(8.303,55.5) 9.353,54.45 10.353,54.45 C34.1@10.503,54.3 ; C34.1@10.379,54.275 11.356,54.275 ; C36.1@10.503,49.2 10.603,49.3 10.653,49.3 10.703,49.35 C36.1@10.703,49.358 ; C36.1@10.527,49.358 C36.1@10.703,49.358 ; v1(11.103,45.9) 11.103,45.1 C38.1@10.203,44.2 11.303,44.2 ; 11.377,49.358 C36.1@10.703,49.358 ; v1(11.43,50.642) 10.703,49.915 C36.1@10.703,49.358 ; v1(18.1,37.7) 18.1,37.565 17.5,36.965 C3.2@17.5,36.2 17.6,36.3 19.3,36.3 U2.1@19.35,36.25 19.4,36.2 20.6,36.2 20.8,36 20.8,34.5 20.7,34.4 19.4,34.4 U2.3@19.35,34.35
  Top Layer w0.8: v1(2,13.7) 2,14 2.4,14.4 2.4,16.5 D3.1@2.8,16.9
  Bottom Layer w0.3: v1(3,55.8) 3.048,55.848 v1(3.048,60.122)